# Altium PCB ESC.PcbDoc
Units mm, origin at the board's own origin, x right, y up, seen from the top; angles counter-clockwise.
Board outline 50 x 25 mm, 2 copper layers (Top Layer, Bottom Layer), stack 1.569 mm thick; 34 components, 37 nets, 135 pads, 638 vias.
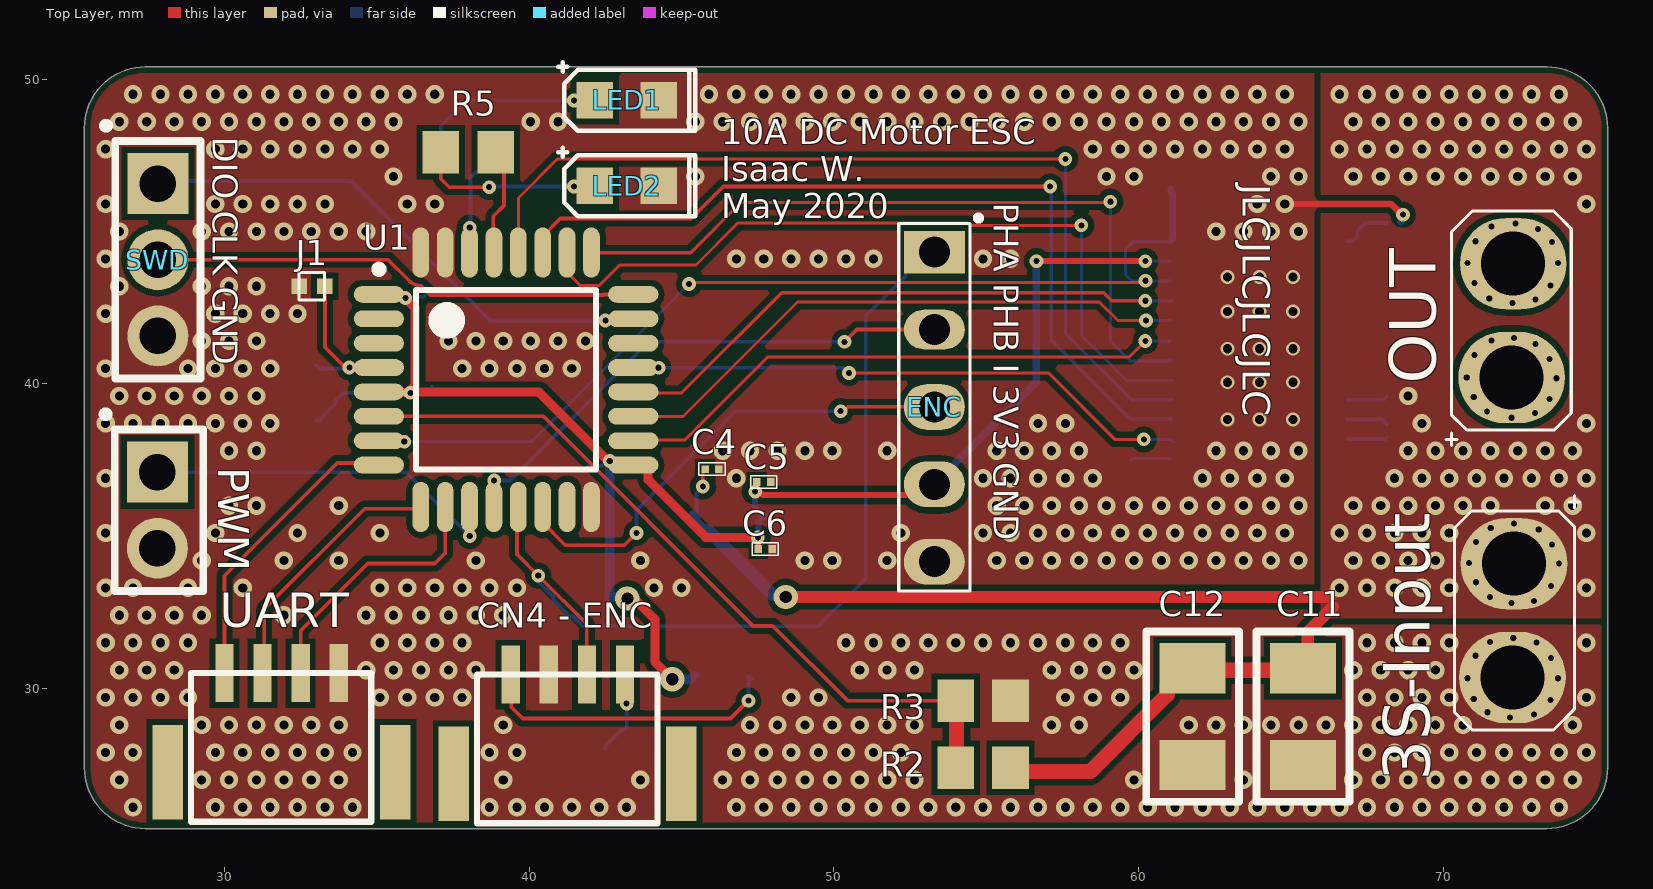
[diagram p0: Top Layer view]
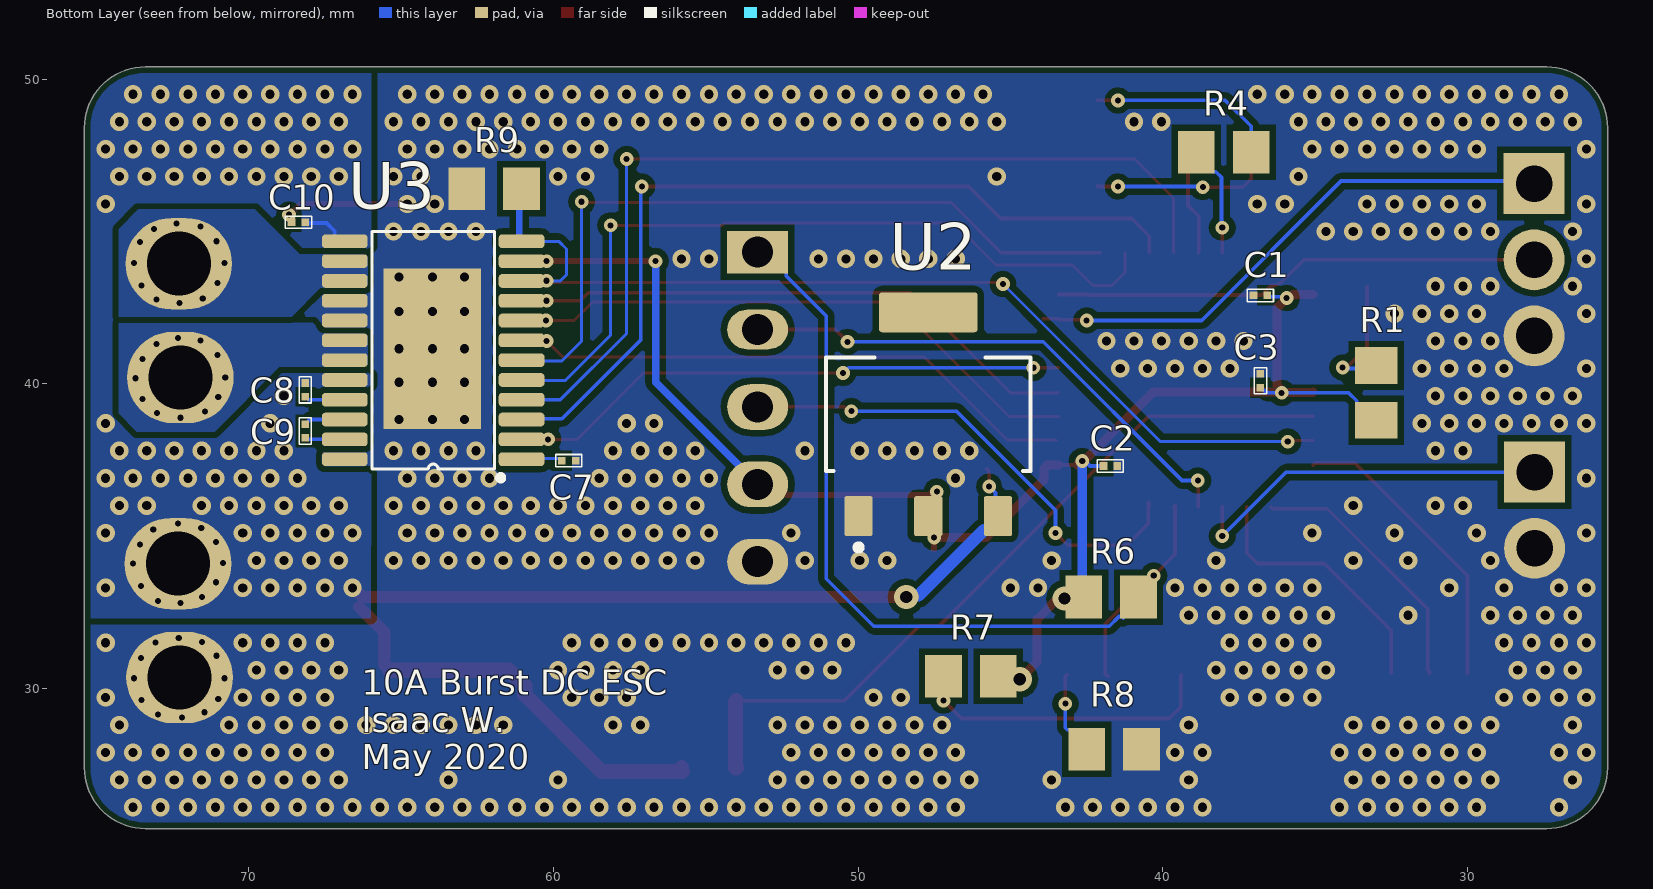
[diagram p1: Bottom Layer view, seen from below]

## Layer stack, top to bottom
Top Solder: solder mask 0.0254, SM-001, Dk 4
Top Layer: signal copper 0.035
Dielectric 1: core 1.4986, Core-043, Dk 4.3
Bottom Layer: signal copper 0.035
Bottom Solder: solder mask 0.0254, SM-001, Dk 4

## Board outline
25.4,27.4 25.4,48.4 cw(c27.4,48.4) 27.4,50.4 73.4,50.4 cw(c73.4,48.4) 75.4,48.4 75.4,27.4 cw(c73.4,27.4) 73.4,25.4 27.4,25.4 cw(c27.4,27.4)

## Design rules (kind name [scope] priority, off if disabled: settings)
BoardOutlineClearance [All] p1: gap=0.2 ignorepadtopadclearanceinfootprint=FALSE except(0.4: Arc-SplitBarrior Arc-SplitContinuation Track-SplitBarrior Track-SplitContinuation SMDPad-SplitBarrior SMDPad-SplitContinuation THPad-SplitBarrior THPad-SplitContinuation Via-SplitBarrior Via-SplitContinuation Fill-SplitBarrior Fill-SplitContinuation Poly-SplitBarrior Poly-SplitContinuation Region-SplitBarrior Region-SplitContinuation Text-SplitBarrior Text-SplitContinuation)
Clearance "Clearance Bottom Layer" [OnLayer('Bottom Layer')] p1: gap=0.203 ignorepadtopadclearanceinfootprint=TRUE except(0.254: Arc-Text Track-Text SMDPad-Text THPad-Text Via-Text Fill-Text Poly-Text Region-Text Text-Text)
Clearance "Clearance Top Layer" [OnLayer('Top Layer')] p2: gap=0.203 ignorepadtopadclearanceinfootprint=TRUE except(0.254: Arc-Text Track-Text SMDPad-Text THPad-Text Via-Text Fill-Text Poly-Text Region-Text Text-Text)
Clearance [All] p3: gap=0.2 ignorepadtopadclearanceinfootprint=FALSE except(0.089: Arc-Arc Arc-Track Arc-SMDPad Track-Track Track-SMDPad SMDPad-SMDPad; 0.127: Arc-Via Track-Via SMDPad-Via THPad-Via Via-Via; 0.254: Arc-Text Track-Text SMDPad-Text THPad-Text Via-Text Fill-Text Poly-Text Region-Text Text-Text)
HoleSize [All] p1: absolutevalues=TRUE maxlimit=6.3 minlimit=0.2 maxpercent=80.000 minpercent=20.000
MinimumAnnularRing [All] p1: minimumring=0.076
MinimumSolderMaskSliver [All] p1: minsoldermaskwidth=0.1
PlaneConnect [All] p1: planeconnectstyle=Direct reliefexpansion=0.508 reliefentries=4 reliefconductorwidth=0.254 reliefairgap=0.254
PolygonConnect PolygonConnect_1 [All] p1: connectstyle=Direct reliefconductorwidth=0.508 reliefentries=4 polygonreliefangle="90 Angle" airgapwidth=0.254
RoutingCorners [All] p1: cornerstyle=Round minsetback=2.54 maxsetback=2.54
RoutingVias [All] p1: holewidth=0.5 width=1 viastyle="Through Hole" minholewidth=0.2 minwidth=0.45 maxholewidth=1 maxwidth=2
SilkToSilkClearance [All] p1: silktosilkclearance=0.1
SilkToSolderMaskClearance [IsPad] p1: minsilkscreentomaskgap=0.1 clearancetoexposedcopper=TRUE
SolderMaskExpansion SolderMaskExpansion_1 [IsVia] p1: expansion=0.102 istentingtop=TRUE
SolderMaskExpansion [InPadClass('All Pads')] p2: expansion=0.102 istentingtop=FALSE
Width [All] p1: maxlimit=2.54 minlimit=0.089 preferedwidth=0.381
24 further rules are at their usual default settings.

## Classes and differential pairs
component class U_Power: 3S-Input C4 C5 C6 U2
component class U_MCU: C1 C2 C3 J1 R1 SWD U1
component class U_DRV8873: C7 C8 C9 C10 C11 C12 OUT R9 U3
component class ESC: "CN4 - ENC" LED1 LED2 PWM R2 R3 R4 R5 R6 R7 R8 UART

## Components (designator, comment, footprint, x,y, rotation, side; value= is the part's Value field where it differs from the comment)
3S-Input "JST_Leads_In" Power_Leads 72.275,32.9 r270 top (schematic designator CN2)
C1 "Cap" 0402 36.8,42.9 r180 bottom value=100pF
C2 "Cap" 0402 41.725,37.3 r0 bottom value=100nF
C3 "Cap" 0402 36.8,40.1 r270 bottom value=100pF
C4 "Cap" 0402 46,37.2 r180 top value=100nF
C5 "Cap" 0402 47.7,36.775 r180 top value=100nF
C6 "Cap" 0402 47.75,34.575 r180 top value=100nF
C7 "Cap" 0402 59.5,37.475 r180 bottom value=1uF
C8 "Cap" 0402 68.15,39.8 r90 bottom value=1uF
C9 "Cap" 0402 68.15,38.45 r90 bottom value=47nF
C10 "Cap" 0402 68.375,45.3 r180 bottom value=100nF
C11 "Cap" 1206 65.4,29.075 r90 top value=47uF
C12 "Cap" 1206 61.775,29.075 r90 top value=47uF
"CN4 - ENC" "JST_GH-4P" JST_GH-4P 43.146,30.451 r270 top (schematic designator CN4)
ENC "5P-2.5mm" 5-Pin-Header 53.3,44.32 r0 top (schematic designator CN5)
J1 "Jumper" Jumper 33.288,43.2 r180 top
LED1 "LED" 0805-LED 43.2,49.3 r0 top
LED2 "LED" 0805-LED 43.2,46.5 r0 top
OUT "JST_Leads_In" Power_Leads 72.3,41.4 r90 top (schematic designator CN6)
PWM "2P-2.5mm" 2.5mm-2P 27.8,37.1 r0 top (schematic designator CN7)
R1 "1k" "0805 - duplicate" 33,39.7 r270 bottom
R2 "20k" "0805 - duplicate" 54.9,27.4 r0 top
R3 "4k" "0805 - duplicate" 54.9,29.6 r0 top
R4 "4k" "0805 - duplicate" 38,47.6 r180 bottom
R5 "2k" "0805 - duplicate" 38,47.6 r180 top
R6 "5k" "0805 - duplicate" 41.7,33 r180 bottom
R7 "500R" "0805 - duplicate" 46.3,30.4 r0 bottom
R8 "0R" "0805 - duplicate" 41.6,28 r0 bottom
R9 "150R" "0805 - duplicate" 61.95,46.4 r180 bottom
SWD "3P-2.5mm" 2.5mm-3P 27.813,46.569 r0 top (schematic designator CN1)
U1 "STM32F031K6T6" STM-LQFP32_N 39.243,40.132 r0 top locked
U2 "AMS1117-3.3" SOT229P700X180-4N 47.7,39 r180 bottom locked
U3 "DRV8873S" HTSSOP24 61.05,37.525 r0 bottom locked
UART "JST_GH-4P" JST_GH-4P 33.75,30.5 r270 top (schematic designator CN3)

## Footprints (in the part's own frame and the unit in brackets; to place one, negate y for a bottom-side part, rotate by r counter-clockwise, add the part's x,y. Pads: shape width x height; smd on the part's side, far side on the other; paste and mask are expansions set on the pad)
2.5mm-2P [mm]
  rect 2x2 hole 1.2: 1(0,0)
  round 2 hole 1.2: 2(0,-2.5)
  silkscreen extent -1.8,-3.9 1.5,2
2.5mm-3P [mm]
  rect 2x2 hole 1.2: 1(0,0)
  round 2 hole 1.2: 2(0,-2.5) 3(0,-5)
  silkscreen extent -1.8,-6.4 1.4,2
5-Pin-Header [mm]
  rect 2x1.4 hole 1.02: 1(0,0)
  oval 2x1.3 hole 1.02: 2(0,-2.54)
  oval 2x1.5 hole 1.02: 3(0,-5.08) 4(0,-7.62) 5(0,-10.16)
  silkscreen extent -1.17,-11.12 1.5,1.17
0402 [mm]
  rect 0.25x0.25 smd mask+0.05: 1(-0.225,0) 2(0.225,0)
  silkscreen extent -0.43,-0.2 0.43,0.2
"0805 - duplicate" [mm] "Chip Resistor, Body 2.0x1.2mm, IPC Medium Density"
  rect 1.2x1.4 smd: 1(-0.9,0) 2(0.9,0)
  body extent -1.07,-0.7 1.07,0.7, height 0.7
0805-LED [mm]
  rect 1.2x1.2 smd: 1(-1.05,0) 2(1.05,0)
  silkscreen extent -2.25,-1 2.25,1.25
1206 [mil]
  rect 65x85 smd: 1(-62.5,0) 2(62.5,0)
  silkscreen extent -110,-60 110,60
HTSSOP24 [mm]
  rrect50% 1.5x0.45 smd mask+0.05: 1(0,0) 2(0,-0.65) 3(0,-1.3) 4(0,-1.95) 5(0,-2.6) 6(0,-3.25) 7(0,-3.9) 8(0,-4.55) 9(0,-5.2) 10(0,-5.85) 11(0,-6.5) 12(0,-7.15) 13(5.8,-7.15) 14(5.8,-6.5) 15(5.8,-5.85) 16(5.8,-5.2) 17(5.8,-4.55) 18(5.8,-3.9) 19(5.8,-3.25) 20(5.8,-2.6) 21(5.8,-1.95) 22(5.8,-1.3) 23(5.8,-0.65) 24(5.8,0)
  rect 3.2x5.26 smd: THERM(2.925,-3.625)
  Top Layer region: 1.325,-6.2
  silkscreen extent 0.63,-7.48 4.9,0.67
JST_GH-4P [mm]
  rect 1.9x0.6 smd: 1(0,-3.75) 2(0,-2.5) 3(0,-1.25) 4(0,0)
  rect 3.1x1 smd: 5(3.251,1.854) 5(3.251,-5.613)
  silkscreen extent 0,-4.85 4.88,1.07
Jumper [mil]
  rect 20x20 smd: 1(0,0) 2(33,0)
  silkscreen extent 0,-18 33,18
Power_Leads [mm]
  oval 3x3.5 hole 2.1: A(-1.194,0.051) K(2.54,0)
  silkscreen extent -3.43,-1.91 4.27,2.21
SOT229P700X180-4N [mm]
  rrect15% 0.93x1.31 smd: 1(-2.29,-3.345) 2(0,-3.345) 3(2.29,-3.345)
  rrect15% 3.24x1.31 smd: 4(0,3.345)
  silkscreen extent -3.36,-4.47 3.36,1.86
STM-LQFP32_N [mm] "QFP, 32-Leads, Body 7x7mm, Pitch 0.8mm, IPC Medium Density"
  oval 1.65x0.55 smd: 1(-4.175,2.8) 2(-4.175,2) 3(-4.175,1.2) 4(-4.175,0.4) 5(-4.175,-0.4) 6(-4.175,-1.2) 7(-4.175,-2) 8(-4.175,-2.8) 17(4.175,-2.8) 18(4.175,-2) 19(4.175,-1.2) 20(4.175,-0.4) 21(4.175,0.4) 22(4.175,1.2) 23(4.175,2) 24(4.175,2.8)
  oval 0.55x1.65 smd: 9(-2.8,-4.175) 10(-2,-4.175) 11(-1.2,-4.175) 12(-0.4,-4.175) 13(0.4,-4.175) 14(1.2,-4.175) 15(2,-4.175) 16(2.8,-4.175) 25(2.8,4.175) 26(2,4.175) 27(1.2,4.175) 28(0.4,4.175) 29(-0.4,4.175) 30(-1.2,4.175) 31(-2,4.175) 32(-2.8,4.175)
  silkscreen extent -4.3,-2.95 2.95,3.75, body extent -3.5,-3.5 3.5,3.5, height 1.6

## Part data
R1 R2 R3 R4 R5 R6 R7 R8 R9: library part Resistor
U1: library part CMP-0304-00091-2, "ARM Cortex-M0 32-bit MCU, 32 KB Flash, 4 KB Internal RAM, 25 I/Os, 32-Pin LQFP, -40 to 85 degC, Tray", I/Os (High Current)=25, Manufacturer=STMicroelectronics, Operating Frequency(F) (Processor speed) (MHz)=48, Package Description="32-Pin Low Profile Quad Flat Package, 7 x 7 mm Body, 0.8 mm Pitch", Package Reference=LQFP32, Supply Voltage(Vcc) min (V)=2, ComponentLink1Description="Manufacturer URL", ComponentLink1URL=http://www.st.com/, ComponentLink2Description=Datasheet, ComponentLink2URL=http://www.st.com/st-web-ui/static/active/en/resource/technical/document/datasheet/DM00104043.pdf, Core="ARM Cortex-M0", DatasheetVersion="Rev. 3", FLASH Size (Prog) (kB)=32, Internal RAM Size (kB)=4, Mounting Technology="Surface Mount", Packing=Tray, PartNumber=STM32F031K6T6
U2: "Sot223/Pkg 1-Amp 3.3-Volt Low Drop Out Voltage Regulatator", Package=None, Availability=Unavailable, MF="Advanced Monolithic Systems", MP=AMS1117-3.3, Price=None, SnapEDA_Link=https://www.snapeda.com/parts/AMS1117-3.3/Advanced%20Monolithic%20Systems/view-part/53450/?ref=snap
C1 C2 C3 C4 C5 C6 C7 C8 C9 C10 C11 C12: LatestRevisionDate=17-Jul-2002, LatestRevisionNote="Re-released for DXP Platform.", PackageDescription="Radial Cap, Thru-Hole; 2 Leads; 0.3 in Pin Spacing", PackageReference=RAD-0.3, Published=8-Jun-2000, Publisher="Altium Limited"

## Via types
v1: diameter 0.6, hole 0.3, Top Layer to Bottom Layer, tented both sides, 536 vias
v2: diameter 0.276, hole 0.2, Top Layer to Bottom Layer, tented both sides, 48 vias
v3: diameter 0.45, hole 0.2, Top Layer to Bottom Layer, tented both sides, 36 vias
v4: diameter 0.457, hole 0.3, Top Layer to Bottom Layer, tented both sides, 15 vias
v5: diameter 0.8, hole 0.4, Top Layer to Bottom Layer, tented both sides, 3 vias

## Nets (pads, with @x,y where several pads share a name; then routed paths per layer and width w, separated by ;. In a path a pad name is that pad's centre, name@x,y a point inside that pad or via, vN(x,y) a via of type N, cw(c..) or ccw(c..) an arc to the next point about the centre after c; other vN are vias at no path point)
3V3: C1.2 C2.2 C3.2 C5.2 C6.2 ENC.4 R1.2 R6.1 R7.1 U1.1 U1.5 U1.17 U2.2 U3.11 | length 55.4
  Top Layer w0.12: v3(42.647,37.464) 42.654,37.457 42.779,37.332 42.8,37.332 U1.17
  Top Layer w0.2: v3(47.417,36.459) 47.465,36.411 47.611,36.411 47.674,36.347 52.345,36.347 52.776,36.778 ENC.4@53.222,36.778 ; v3(47.507,34.957) 47.539,34.925 47.516,34.902 47.516,34.584 C6.2 ; v3(56.65,44.025) v3(60.225,44.025)
  Top Layer w0.3: U1.5 35.084,39.716 36.084,39.716 36.084,39.769 36.25,39.935 36.25,42.498 v3(35.937,42.811) 35.874,42.875 35.785,42.875 35.727,42.932 U1.1 ; v3(36.1,39.7) 36.125,39.725 40.325,39.725 42.593,37.457 42.654,37.457 42.675,37.457 U1.17@42.8,37.332 ; v5(43.225,32.95) 43.45,32.95 44.125,32.275 44.125,30.875 v5(44.7,30.3) ; U1.17 43.79,37.332 43.906,37.217 43.906,36.844 45.793,34.957 v3(47.507,34.957)
  Bottom Layer w0.1: v3(60.225,44.025) U3.11
  Bottom Layer w0.12: R1.2 33.1,38.8 33.64,39.34 33.64,39.44 33.9,39.7 v3(36.1,39.7) 36.6,39.7 36.71,39.81 36.735,39.81 C3.2 C3.2@36.8,39.9 ; v3(35.937,42.811) 35.984,42.859 36.534,42.859 C1.2 ; C2.2 42.393,37.3 42.558,37.464 v3(42.647,37.464) ; R6.1 42.6,33.025 R6.1@42.625,33.05
  Bottom Layer w0.2: v3(47.417,36.459) 47.417,35.938 U2.2 47.525,35.48 47.525,34.974 v3(47.507,34.957)
  Bottom Layer w0.25: ENC.4 56.65,40.05 v3(56.65,44.025)
  Bottom Layer w0.3: R6.1 43.175,33 v5(43.225,32.95) ; R6.1@42.625,33.05 42.647,33.072 v3(42.647,37.464) ; v5(44.7,30.3) 45.3,30.3 R7.1 R7.1@45.425,30.425
5V: 
12V: 3S-Input.A C4.2 C8.2 C10.2 C11.2 C12.2 R2.2 U2.3 U3.13 U3.20 | length 39.7
  Top Layer w0.12: v3(45.7,36.625) 45.7,37.065 45.71,37.075 45.71,37.135 C4.2
  Top Layer w0.4: v5(48.425,33) 66.266,33 66.566,33.3 v1(66.6,33.3) ; C11.2@65.375,30.6 65.554,30.779 65.554,31.854 66.375,32.675
  Top Layer w0.5: R2.2 55.8,27.3 55.775,27.275 58.425,27.275 60.945,29.795 60.945,30.087 61.459,30.6 C11.2@65.375,30.6
  Bottom Layer w0.12: U2.3 45.41,35.66 45.495,35.745 45.495,36.42 v3(45.7,36.625) ; U3.13 67.024,44.675 67.185,44.836 67.185,45.01 67.45,45.275 68.125,45.275 C10.2
  Bottom Layer w0.4: U2.3 45.41,35.465 45.675,35.2 45.87,35.2 48.02,33.05 48.375,33.05 v5(48.425,33)
  other v1: 67.5,33.3 68.4,33.3 69.3,33.3 70.2,33.3 74.7,33.3 67.05,34.2 67.95,34.2 68.85,34.2 69.75,34.2 66.6,35.1 67.5,35.1 68.4,35.1 69.3,35.1 70.2,35.1 74.7,35.1 67.05,36 67.95,36 68.85,36 69.75,36 70.65,36 71.55,36 73.35,36 74.25,36 68.4,36.9 69.3,36.9 70.2,36.9 71.1,36.9 72,36.9 72.9,36.9 73.8,36.9 74.7,36.9 68.85,37.8 69.75,37.8 70.65,37.8 71.55,37.8 72.45,37.8 73.35,37.8 74.25,37.8 69.3,38.7 74.7,38.7 68.85,39.6 74.7,45.9 67.05,46.8 67.95,46.8 68.85,46.8 69.75,46.8 70.65,46.8 71.55,46.8 72.45,46.8 73.35,46.8 74.25,46.8 66.6,47.7 67.5,47.7 68.4,47.7 69.3,47.7 70.2,47.7 71.1,47.7 72,47.7 72.9,47.7 73.8,47.7 74.7,47.7 67.05,48.6 67.95,48.6 68.85,48.6 69.75,48.6 70.65,48.6 71.55,48.6 72.45,48.6 73.35,48.6 74.25,48.6 66.6,49.5 67.5,49.5 68.4,49.5 69.3,49.5 70.2,49.5 71.1,49.5 72,49.5 72.9,49.5 73.8,49.5
  other v2: 72.25,32.798 72.986,32.875 71.538,33.002 73.545,33.357 71.081,33.484 73.799,34.094 70.853,34.119 73.57,34.729 71.081,34.805 73.139,35.211 71.564,35.262 72.326,35.415
GND: 3S-Input.K "CN4 - ENC.2" C1.1 C2.1 C3.1 C4.1 C5.1 C6.1 C7.2 C10.1 C11.1 C12.1 ENC.5 J1.2 LED1.2 LED2.2 PWM.2 R3.2 R8.1 R9.1 SWD.3 U1.16 U1.31 U1.32 U2.1 U3.16 U3.17 U3.24 U3.THERM UART.4 | length 4.3
  Top Layer w0.2: v1@64.85,45.9 68.3,45.9 68.649,45.551 v3(68.684,45.551)
  Top Layer w0.5: v1(64.8,45.9) v1@64.85,45.9
  Bottom Layer w0.2: C10.1 68.625,45.325 68.625,45.424 68.658,45.457 68.658,45.525 v3(68.684,45.551)
  other v1: 27,26.1 29.7,26.1 30.6,26.1 31.5,26.1 32.4,26.1 33.3,26.1 34.2,26.1 38.7,26.1 39.6,26.1 40.5,26.1 41.4,26.1 42.3,26.1 43.2,26.1 46.8,26.1 47.7,26.1 48.6,26.1 49.5,26.1 50.4,26.1 51.3,26.1 52.2,26.1 53.1,26.1 54,26.1 54.9,26.1 55.8,26.1 56.7,26.1 57.6,26.1 58.5,26.1 59.4,26.1 60.3,26.1 61.2,26.1 62.1,26.1 63,26.1 63.9,26.1 64.8,26.1 65.7,26.1 66.6,26.1 67.5,26.1 68.4,26.1 69.3,26.1 70.2,26.1 71.1,26.1 72,26.1 72.9,26.1 73.8,26.1 26.55,27 29.25,27 30.15,27 31.05,27 31.95,27 32.85,27 33.75,27 39.15,27 43.65,27 46.35,27 47.25,27 48.15,27 49.05,27 49.95,27 50.85,27 51.75,27 52.65,27 59.85,27 63.45,27 67.05,27 67.95,27 68.85,27 69.75,27 70.65,27 71.55,27 72.45,27 73.35,27 74.25,27 26.1,27.9 27,27.9 29.7,27.9 30.6,27.9 31.5,27.9 32.4,27.9 33.3,27.9 34.2,27.9 38.7,27.9 39.6,27.9 46.8,27.9 47.7,27.9 48.6,27.9 49.5,27.9 50.4,27.9 51.3,27.9 52.2,27.9 67.5,27.9 68.4,27.9 69.3,27.9 70.2,27.9 71.1,27.9 72,27.9 72.9,27.9 73.8,27.9 74.7,27.9 26.55,28.8 29.25,28.8 30.15,28.8 31.05,28.8 31.95,28.8 32.85,28.8 33.75,28.8 39.15,28.8 47.25,28.8 48.15,28.8 49.05,28.8 49.95,28.8 50.85,28.8 51.75,28.8 52.65,28.8 57.15,28.8 58.05,28.8 61.65,28.8 62.55,28.8 63.45,28.8 64.35,28.8 65.25,28.8 66.15,28.8 67.05,28.8 67.95,28.8 68.85,28.8 69.75,28.8 70.65,28.8 74.25,28.8 26.1,29.7 27,29.7 27.9,29.7 28.8,29.7 35.1,29.7 36,29.7 36.9,29.7 37.8,29.7 48.6,29.7 49.5,29.7 57.6,29.7 58.5,29.7 59.4,29.7 67.5,29.7 68.4,29.7 69.3,29.7 70.2,29.7 74.7,29.7 26.55,30.6 27.45,30.6 28.35,30.6 34.65,30.6 35.55,30.6 36.45,30.6 37.35,30.6 38.25,30.6 50.85,30.6 51.75,30.6 52.65,30.6 57.15,30.6 58.05,30.6 58.95,30.6 59.85,30.6 67.05,30.6 67.95,30.6 68.85,30.6 69.75,30.6 26.1,31.5 27,31.5 27.9,31.5 28.8,31.5 35.1,31.5 36,31.5 36.9,31.5 37.8,31.5 50.4,31.5 51.3,31.5 52.2,31.5 53.1,31.5 54,31.5 54.9,31.5 55.8,31.5 56.7,31.5 57.6,31.5 58.5,31.5 59.4,31.5 67.5,31.5 68.4,31.5 69.3,31.5 70.2,31.5 74.7,31.5 26.55,32.4 27.45,32.4 28.35,32.4 29.25,32.4 31.95,32.4 34.65,32.4 35.55,32.4 36.45,32.4 37.35,32.4 38.25,32.4 39.15,32.4 26.1,33.3 27,33.3 28.8,33.3 30.6,33.3 35.1,33.3 36,33.3 36.9,33.3 37.8,33.3 38.7,33.3 39.6,33.3 44.1,33.3 45,33.3 29.25,34.2 31.95,34.2 33.75,34.2 38.25,34.2 43.65,34.2 49.05,34.2 49.95,34.2 51.75,34.2 55.35,34.2 56.25,34.2 57.15,34.2 58.05,34.2 58.95,34.2 59.85,34.2 60.75,34.2 61.65,34.2 62.55,34.2 63.45,34.2 64.35,34.2 65.25,34.2 26.1,35.1 29.7,35.1 32.4,35.1 35.1,35.1 52.2,35.1 54.9,35.1 55.8,35.1 56.7,35.1 57.6,35.1 58.5,35.1 59.4,35.1 60.3,35.1 61.2,35.1 62.1,35.1 63,35.1 63.9,35.1 64.8,35.1 30.15,36 31.05,36 33.75,36 55.35,36 56.25,36 57.15,36 58.05,36 58.95,36 59.85,36 60.75,36 61.65,36 62.55,36 63.45,36 64.35,36 65.25,36 26.1,36.9 46.8,36.9 54.9,36.9 55.8,36.9 56.7,36.9 57.6,36.9 58.5,36.9 62.1,36.9 63,36.9 63.9,36.9 64.8,36.9 30.15,37.8 31.05,37.8 46.35,37.8 47.25,37.8 48.15,37.8 49.05,37.8 49.95,37.8 51.75,37.8 55.35,37.8 56.25,37.8 57.15,37.8 58.05,37.8 62.55,37.8 63.45,37.8 64.35,37.8 65.25,37.8 26.1,38.7 27,38.7 27.9,38.7 28.8,38.7 29.7,38.7 30.6,38.7 31.5,38.7 56.7,38.7 57.6,38.7 26.55,39.6 27.45,39.6 28.35,39.6 29.25,39.6 30.15,39.6 31.05,39.6 26.1,40.5 28.8,40.5 29.7,40.5 30.6,40.5 31.5,40.5 37.8,40.5 38.7,40.5 39.6,40.5 40.5,40.5 41.4,40.5 29.25,41.4 30.15,41.4 31.05,41.4 37.35,41.4 38.25,41.4 39.15,41.4 40.05,41.4 40.95,41.4 41.85,41.4 26.1,42.3 29.7,42.3 30.6,42.3 31.5,42.3 32.4,42.3 26.55,43.2 29.25,43.2 30.15,43.2 31.05,43.2 26.1,44.1 46.8,44.1 47.7,44.1 48.6,44.1 49.5,44.1 50.4,44.1 51.3,44.1 54.9,44.1 55.8,44.1 26.55,45 29.25,45 30.15,45 31.05,45 31.95,45 32.85,45 33.75,45 34.65,45 62.55,45 63.45,45 64.35,45 65.25,45 26.1,45.9 29.7,45.9 30.6,45.9 31.5,45.9 32.4,45.9 33.3,45.9 36,45.9 36.9,45.9 63.9,45.9 35.55,46.8 45.45,46.8 58.95,46.8 59.85,46.8 64.35,46.8 65.25,46.8 26.1,47.7 29.7,47.7 30.6,47.7 31.5,47.7 32.4,47.7 33.3,47.7 34.2,47.7 35.1,47.7 58.5,47.7 59.4,47.7 60.3,47.7 61.2,47.7 62.1,47.7 63,47.7 63.9,47.7 64.8,47.7 26.55,48.6 27.45,48.6 28.35,48.6 29.25,48.6 30.15,48.6 31.05,48.6 31.95,48.6 32.85,48.6 33.75,48.6 34.65,48.6 35.55,48.6 40.05,48.6 40.95,48.6 45.45,48.6 46.35,48.6 47.25,48.6 48.15,48.6 49.05,48.6 49.95,48.6 50.85,48.6 51.75,48.6 52.65,48.6 53.55,48.6 54.45,48.6 55.35,48.6 56.25,48.6 57.15,48.6 58.05,48.6 58.95,48.6 59.85,48.6 60.75,48.6 61.65,48.6 62.55,48.6 63.45,48.6 64.35,48.6 65.25,48.6 27,49.5 27.9,49.5 28.8,49.5 29.7,49.5 30.6,49.5 31.5,49.5 32.4,49.5 33.3,49.5 34.2,49.5 35.1,49.5 36,49.5 36.9,49.5 45.9,49.5 46.8,49.5 47.7,49.5 48.6,49.5 49.5,49.5 50.4,49.5 51.3,49.5 52.2,49.5 53.1,49.5 54,49.5 54.9,49.5 55.8,49.5 56.7,49.5 57.6,49.5 58.5,49.5 59.4,49.5 60.3,49.5 61.2,49.5 62.1,49.5 63,49.5 63.9,49.5 64.8,49.5
  other v2: 72.199,29.039 72.986,29.141 71.462,29.217 73.52,29.623 71.005,29.649 70.802,30.335 73.774,30.335 73.545,30.995 71.056,31.071 73.062,31.503 71.538,31.528 72.3,31.655
  other v4: 62.925,38.825 63.975,38.825 65.075,38.825 62.925,40.05 63.975,40.05 65.075,40.05 62.925,41.15 63.975,41.15 65.075,41.15 62.925,42.375 63.975,42.375 65.075,42.375 62.925,43.5 63.975,43.5 65.075,43.5
NetC7_1: C7.1 U3.1 | length 1.4
  Bottom Layer w0.1: C7.1 59.8,37.55 61,37.55 61.025,37.525 U3.1
NetC8_1: C8.1 U3.21 | length 1.3
  Bottom Layer w0.12: U3.21 68.05,39.475 C8.1
NetC9_1: C9.1 U3.23 | length 1.3
  Bottom Layer w0.12: U3.23 68.1,38.175 C9.1
NetC9_2: C9.2 U3.22 | length 1.4
  Bottom Layer w0.12: U3.22 68,38.825 C9.2
NetCN1_1: SWD.1 U1.23 | length 18.1
  Top Layer w0.12: U1.23 U1.23@43.929,42.132
  Top Layer w0.125: v3(42.5,42.075) 42.528,42.103 43.389,42.103 U1.23
  Bottom Layer w0.125: SWD.1@27.8,46.65 34.15,46.65 38.725,42.075 v3(42.5,42.075)
  Bottom Layer w0.381: SWD.1@27.8,46.65 27.813,46.637 SWD.1
NetCN1_2: SWD.2 U1.24 | length 16.1
  Top Layer w0.12: SWD.2 35.37,44.069 36.062,43.376 ccw(c36.443,43.757) 36.443,43.219 36.448,43.219 36.755,42.912 42.43,42.912 42.45,42.932 U1.24
NetCN3_1: U1.8 UART.1 | length 9.8
  Top Layer w0.12: UART.1 30,33.7 33.7,37.4 35,37.4 U1.8
NetCN3_2: U1.9 UART.2 | length 8.7
  Top Layer w0.12: UART.2 31.25,30.55 31.3,30.6 31.3,32.6 34.6,35.9 36.386,35.9 U1.9
NetCN3_3: U1.10 UART.3 | length 8.7
  Top Layer w0.12: UART.3 32.5,31.9 34.7,34.1 36.9,34.1 37.243,34.443 U1.10
NetCN4_1: "CN4 - ENC.1" R7.2 | length 10.2
  Top Layer w0.12: 39.396,30.451 39.396,30.404 39.409,30.391 39.409,29.391 39.788,29.012 44.39,29.012 44.391,29.013 45.609,29.013 45.61,29.012 46.612,29.012 v3(47.2,29.6)
  Bottom Layer w0.12: v3(47.2,29.6) R7.2 R7.2@47.3,30.3
NetCN4_3: "CN4 - ENC.3" ENC.1 R6.2 U1.13 | length 31
  Top Layer w0.12: U1.13 39.6,36 39.6,34.4 v3(40.3,33.7) 41.896,32.104 41.896,30.451 41.851,30.451 41.8,30.4 ; ENC.1@53.275,44.175 53.3,44.2 ENC.1
  Bottom Layer w0.12: v3(40.3,33.7) 40.3,33.5 R6.2 40.8,32.9 R6.2@41.3,32.4 ; 41.3,32.3 R6.2@41.3,32.4 ; ENC.1 53.255,44.32 53.2,44.375 53.105,44.375 52.36,43.63 52.36,43.535 51.05,42.225 51.05,33.6 49.487,32.037 41.763,32.037 41.44,32.36 41.34,32.36 R6.2@41.3,32.4
NetCN4_4: "CN4 - ENC.4" R8.2 | length 2.8
  Top Layer w0.12: 43.146,30.451 43.2,30.397 v3(43.2,29.5)
  Bottom Layer w0.12: R8.2 42.5,28.1 43.04,28.64 43.13,28.64 43.2,28.71 v3(43.2,29.5)
NetCN5_2: ENC.2 U1.12 | length 17.4
  Top Layer w0.12: U1.12 38.843,36.818 v3(38.85,36.825) ; v3(50.35,41.375) 50.755,41.78 ENC.2
  Bottom Layer w0.12: v3(38.85,36.825) 39.375,36.825 43.925,41.375 v3(50.35,41.375)
NetCN5_3: ENC.3 U1.14 | length 16.3
  Top Layer w0.12: U1.14 40.443,36.068 40.475,36.1 40.475,35.414 41.189,34.7 43.125,34.7 v3(43.525,35.1) ; v3(50.225,39.1) 50.314,39.1 50.454,39.24 ENC.3
  Bottom Layer w0.12: v3(43.525,35.1) 43.525,35.85 46.775,39.1 v3(50.225,39.1)
NetCN6_A: OUT.A U3.18 U3.19 | length 0.1
  Bottom Layer w0.12: OUT.A@72.249,40.151 OUT.A
  other v2: 72.249,38.885 73.011,39.038 71.436,39.089 73.494,39.495 71.005,39.571 73.722,40.181 70.776,40.206 73.494,40.816 71.03,40.943 73.037,41.298 71.589,41.425 72.325,41.502
NetCN6_K: OUT.K U3.14 U3.15
  other v2: 72.275,42.645 73.037,42.772 71.513,42.797 73.519,43.229 71.03,43.305 70.801,43.965 73.773,43.965 73.57,44.651 71.055,44.677 73.113,45.083 71.589,45.159 72.376,45.261
NetCN7_1: PWM.1 U1.11 | length 12.2
  Top Layer w0.12: PWM.1 PWM.1@27.9,37 ; U1.11 38.046,35.953 38.046,35.004 v3(38.05,35)
  Bottom Layer w0.12: PWM.1 35.95,37.1 v3(38.05,35)
NetJ1_1: J1.1 R1.1 U1.4 | length 4.2
  Top Layer w0.12: J1.1@33.3,43.2 33.3,41.2 33.968,40.532 v3(34.1,40.532)
  Bottom Layer w0.12: R1.1 33.1,40.5 34.068,40.5 v3(34.1,40.532)
NetJ2_1: 
NetLED1_1: LED1.1 R4.2 | length 6.3
  Top Layer w0.12: v3(41.475,49.3) LED1.1
  Bottom Layer w0.12: R4.2 37.1,48.45 37.95,49.3 v3(41.475,49.3)
NetLED2_1: LED2.1 R5.2 | length 6.1
  Top Layer w0.12: R5.2 37.1,46.725 37.375,46.45 38.685,46.45 v3(38.687,46.452) ; v3(41.475,46.475) 42.125,46.475 LED2.1
  Bottom Layer w0.12: v3(38.687,46.452) 38.71,46.475 v3(41.475,46.475)
NetR2_1: R2.1 R3.1 U1.6 | length 25
  Top Layer w0.12: U1.6 40.468,38.932 47.35,32.05 48,32.05 50.45,29.6 R3.1
  Top Layer w0.5: R2.1 54.025,27.4 54.025,29.575 R3.1
NetR4_1: R4.1 U1.30 | length 3.7
  Top Layer w0.12: U1.30 38.05,44.314 v3(38.05,45.125)
  Bottom Layer w0.12: v3(38.05,45.125) 38.05,45.15 38.075,45.175 38.075,46.775 38.26,46.96 38.36,46.96 38.9,47.5 R4.1
NetR5_1: R5.1 U1.29 | length 3.6
  Top Layer w0.12: U1.29 38.832,44.307 38.825,44.3 38.825,45.5 39.175,45.85 39.175,47.325 R5.1
NetR9_2: R9.2 U1.7 U3.10 U3.12 | length 33.1
  Top Layer w0.1: U1.7 35.868,38.132 v3(35.9,38.1) ; v3(45.25,43.275) 45.302,43.327 60.176,43.327 v3(60.229,43.38)
  Bottom Layer w0.1: v3(35.9,38.1) 40.075,38.1 v3(45.25,43.275) ; U3.10 60.234,43.375 v3(60.229,43.38) 59.77,43.38 59.575,43.575 59.575,44.425 59.825,44.675 U3.12
  Bottom Layer w0.2: U3.12 61.125,44.75 61.125,46.25 61.05,46.325 R9.2
NetU1_18: U1.18 U3.7 | length 18.9
  Top Layer w0.1: U1.18@43.493,38.132 43.511,38.15 45.1,38.15 47.827,40.877 59.702,40.877 v3(60.225,41.4)
  Bottom Layer w0.1: v3(60.225,41.4) 60.95,41.4 60.975,41.375 61.025,41.425 U3.7
NetU1_19: U1.19 U3.8 | length 19.4
  Top Layer w0.1: U1.19 43.425,38.925 45.05,38.925 48.808,42.683 58.717,42.683 59.325,42.075 v3(60.25,42.075)
  Bottom Layer w0.1: v3(60.25,42.075) U3.8
NetU1_20: U1.20 U3.9 | length 19.2
  Top Layer w0.1: U1.20 43.45,39.7 45,39.7 48.286,42.986 58.864,42.986 59.125,42.725 v3(60.225,42.725)
  Bottom Layer w0.1: v3(60.225,42.725) U3.9 U3.9@61.1,42.725
NetU1_21: U1.21 U3.2 | length 18.7
  Top Layer w0.1: U1.21 43.425,40.525 v3(44.25,40.525) ; v3(50.5,40.35) 57.05,40.35 59.225,38.175 v3(60.175,38.175)
  Bottom Layer w0.1: v3(44.25,40.525) 50.325,40.525 v3(50.5,40.35) ; v3(60.175,38.175) U3.2 U3.2@61.125,38.1
NetU1_25: U1.25 U3.6 | length 24.6
  Top Layer w0.1: U1.25 42.05,44.3 45.3,44.3 46.947,45.947 59.047,45.947 v3(59.075,45.975)
  Bottom Layer w0.1: v3(59.075,45.975) 59.075,41.4 59.725,40.75 61.075,40.75 U3.6
NetU1_26: U1.26 U3.5 | length 25.8
  Top Layer w0.1: U1.26 41.243,43.657 41.675,43.225 42.3,43.225 42.975,43.9 45.475,43.9 46.848,45.273 54.405,45.273 54.478,45.2 v3(58.125,45.2)
  Bottom Layer w0.1: v3(58.125,45.2) 58.125,41.6 59.625,40.1 61.1,40.1 61.075,40.125 U3.5
NetU1_27: U1.27 U3.3 | length 28
  Top Layer w0.12: U1.27 40.443,44.843 41.025,45.425 45.325,45.425 46.375,46.475 v3(57.1,46.475)
  Bottom Layer w0.12: v3(57.1,46.475) 57.138,46.437 57.138,41.437 59.725,38.85 61.075,38.85 U3.3
NetU1_28: U1.28 U3.4 | length 30.4
  Top Layer w0.1: U1.28 39.65,44.314 39.65,46.1 40.925,47.375 v3(57.6,47.375)
  Bottom Layer w0.1: v3(57.6,47.375) 57.6,41.65 59.775,39.475 61.1,39.475 U3.4
pads on no net: "CN4 - ENC.5" U1.2 U1.3 U1.15 U1.22 U2.4 UART.5

## Polygon pours and split planes (outlines as drawn)
GND on Bottom Layer "GND_L02_P004" (solid, pour order 4): 25.05,50.625 25.025,50.6 25.025,25.15 25.05,25.125 75.4,25.125 75.4,50.81
12V on Bottom Layer "12V_L02_P003" (solid, pour order 3): 65.975,45.05 65.975,50.475 75.65,50.475 75.7,50.425 75.7,32.3 65.991,32.3
NetCN6_A on Bottom Layer "NETCN6_A_L02_P002" (solid, pour order 2): 66.1,41.65 67.55,41.65 67.9,42 74.275,42 74.275,39.025 73.675,38.425 71.125,38.425 69,40.55 66.1,40.55
NetCN6_K on Bottom Layer "NETCN6_K_L02_P000" (solid, pour order 0): 66.1,44.25 66.1,43.15 67.65,43.15 68.6,42.2 74.275,42.2 74.275,45.075 73.625,45.725 69.8,45.725 68.325,44.25
GND on Top Layer "GND_L01_P007" (solid, pour order 7): 25.05,50.625 25.025,50.6 25.025,25.15 25.05,25.125 75.4,25.125 75.4,50.81
12V on Top Layer "12V_L01_P006" (solid, pour order 6): 75.196,32.3 65.991,32.3 65.975,32.316 65.975,50.196 65.979,50.2 75.225,50.2

## Silkscreen, mask and mechanical layers (free items; w line width, h text height)
Top Overlay:
  text "DIO CLK GND" at 29.616,48.108 h0.81 r270
  text "JLCJLCJLCJLC" at 63.425,46.55 h0.9 r270
  text "PHA PHB I 3V3 GND" at 55.252,45.948 h0.81 r270
  text "10A DC Motor ESC / Isaac W. / May 2020" at 46.3,45.425 h0.81
Bottom Overlay:
  text "10A Burst DC ESC / Isaac W. / May 2020" at 66.3,27.35 h0.81
Top Solder:
  rectangle: 62.25,38.4 65.7,43.9
  region: 73.7,45.925 74.475,45.15 74.475,38.975 73.725,38.225 75.2,38.225 75.2,45.925
Bottom Solder:
  region: 73.7,45.925 74.475,45.15 74.475,38.975 73.725,38.225 75.2,38.225 75.2,45.925
  region: 73.875,45.75
Mechanical 1:
  the board outline again, w0.152